# Altium PCB 1715A8131-600-R1.pcbdoc (part 2 of 2)
Units mm, origin at the board's own origin, x right, y up, seen from the top; angles counter-clockwise.
Board outline 48.5 x 30.7 mm, 6 copper layers (Top, Internal Layer 1, Internal Plane 1, Internal Plane 2, Internal Layer 2, Bottom), stack 0.72 mm thick; 98 components, 51 nets, 361 pads, 276 vias.
Unrouted connection lines stored in the file: 1.
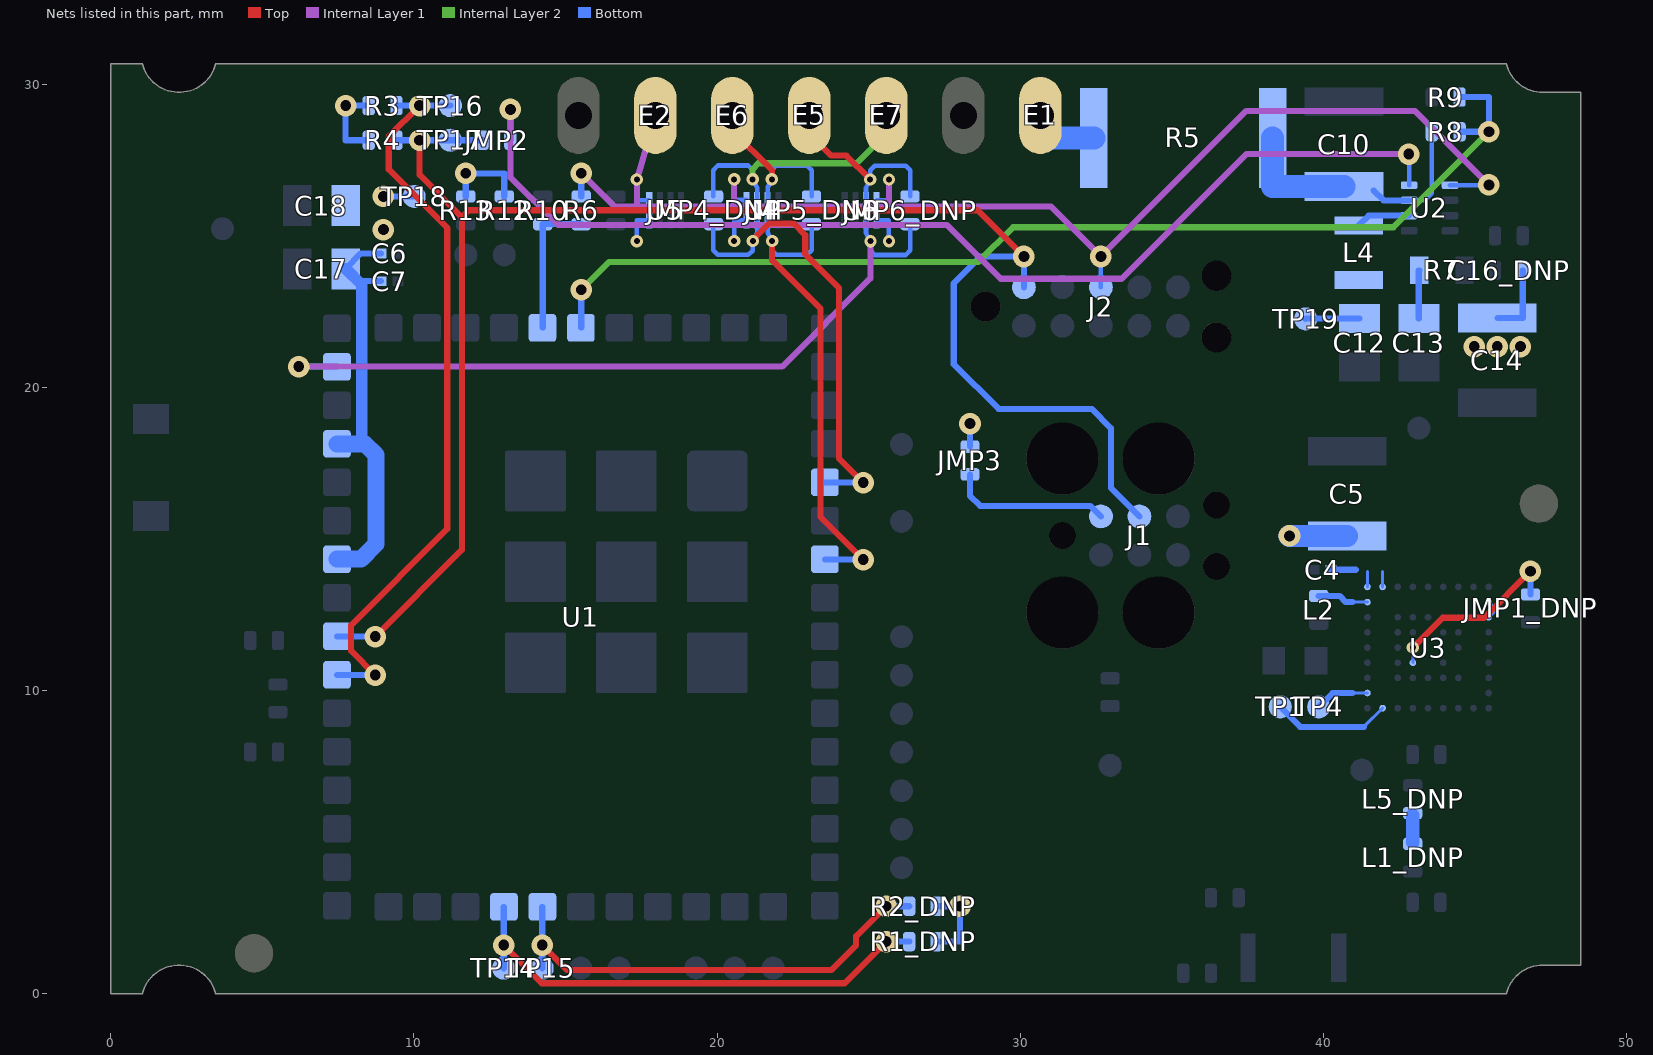
[diagram p6: the nets of this part, all layers, seen from the top]

## Via types
v1: diameter 0.711, hole 0.356, Top to Bottom, tented both sides, 187 vias
v2: diameter 0.406, hole 0.203, Top to Bottom, tented both sides, 53 vias
v3: diameter 0.5, hole 0.2, Top to Bottom, 36 vias

## Nets (pads, with @x,y where several pads share a name; then routed paths per layer and width w, separated by ;. In a path a pad name is that pad's centre, name@x,y a point inside that pad or via, vN(x,y) a via of type N, cw(c..) or ccw(c..) an arc to the next point about the centre after c; other vN are vias at no path point) (continued)
NetJ1_1: J1.1@32.666,15.758 JMP3.2 | length 5.3
  Bottom w0.203: JMP3.2@28.346,17.145 28.346,16.434 28.677,16.104 32.32,16.104 J1.1@32.666,15.758
NetJMP1_DNP_2: JMP1_DNP.2 U3.D4 | length 6.2
  Top w0.203: v2(42.959,11.43) 43.942,12.413 45.306,12.413 v1(46.838,13.945)
  Bottom w0.102: U3.D4@42.959,10.93 v2(42.959,11.43)
  Bottom w0.203: JMP1_DNP.2@46.838,13.182 v1(46.838,13.945)
NetL1_DNP_2: L1_DNP.2 L5_DNP.1 | length 0.9
  Bottom w0.445: L1_DNP.2@42.951,5.004 L5_DNP.1@42.951,5.893
NetL2_1: L2.1 U3.H1 | length 1.7
  Bottom w0.102: 40.959,12.93 U3.H1@41.459,12.93
  Bottom w0.203: L2.1@39.853,13.132 40.539,13.132 40.74,12.93 40.959,12.93
NetL4_1: L4.1 U2.6 | length 1.8
  Bottom w0.203: L4.1@41.173,25.36 41.497,25.683 U2.6@42.835,25.683
NetR1_DNP_2: R1_DNP.2 TP14.1 U1.24 | length 16.5
  Top w0.203: v1(12.961,1.613) 14.219,0.356 24.206,0.356 v1(25.578,1.727)
  Bottom w0.203: TP14.1@12.961,0.851 v1(12.961,1.613) U1.24@12.961,2.867 ; v1(25.578,1.727) R1_DNP.2@26.34,1.727
NetR2_DNP_2: R2_DNP.2 TP15.1 U1.23 | length 15.5
  Top w0.203: v1(14.231,1.613) 15.057,0.787 23.774,0.787 24.587,1.6 24.587,1.905 v1(25.578,2.896)
  Bottom w0.203: TP15.1@14.231,0.851 v1(14.231,1.613) U1.23@14.231,2.867 ; v1(25.578,2.896) R2_DNP.2@26.34,2.896
NetR3_1: R3.1 TP16.1 U1.34 | length 24.7
  Top w0.203: v1(8.723,10.523) 7.925,11.321 7.925,12.167 11.1,15.342 11.1,25.273 9.169,27.203 9.169,28.296 v1(10.185,29.312)
  Bottom w0.203: U1.34@7.469,10.523 v1(8.723,10.523) ; R3.1@9.423,29.312 v1(10.185,29.312) TP16.1@11.201,29.312
NetTP1_1: TP1.1 U3.A2 | length 3.9
  Bottom w0.102: 41.343,8.814 U3.A2@41.959,9.43
  Bottom w0.203: TP1.1@38.583,9.474 39.243,8.814 41.343,8.814
NetTP4_1: TP4.1 U3.B1 | length 1.8
  Bottom w0.102: 40.959,9.93 U3.B1@41.459,9.93
  Bottom w0.203: TP4.1@39.853,9.474 40.308,9.93 40.959,9.93
NetU3_G9: U3.G9 U3.H9 | length 0.7
  Bottom w0.102: U3.G9@45.459,12.43 45.709,12.68 U3.H9@45.459,12.93
"PACK +": E1.1 R5.2 | length 2.5
  Bottom w0.762: E1.1@30.667,28.986 30.667,28.245 R5.2@32.432,28.245
PG: JMP2.2 U2.8 | length 37
  Internal Layer 1 w0.203: v1(13.183,29.185) 13.183,26.949 14.757,25.375 27.584,25.375 29.362,23.597 33.35,23.597 37.465,27.711 v1(42.824,27.711)
  Bottom w0.152: v1(42.824,27.711) 42.835,27.711 U2.8@42.835,26.683
  Bottom w0.203: JMP2.2@13.182,28.169 v1(13.183,29.185)
RESET_N: J1.3 J2.1 JMP2.1 R4.2 TP17.1 U1.35 | length 57.2
  Top w0.203: v1(8.723,11.793) 11.582,14.652 11.582,25.629 ; v1(10.185,28.169) 10.185,27.026 11.582,25.629 ; v1(30.124,24.333) 28.6,25.857 11.811,25.857 11.582,25.629
  Bottom w0.203: U1.35@7.469,11.793 v1(8.723,11.793) ; R4.2@9.423,28.169 v1(10.185,28.169) TP17.1@11.201,28.169 JMP2.1@12.268,28.169 ; J2.1@30.124,23.317 v1(30.124,24.333) 28.702,24.333 27.813,23.444 27.813,20.777 29.289,19.301 32.362,19.301 32.995,18.669 32.995,16.699 J1.3@33.936,15.758
SPI_MISO: E5.1 JMP6_DNP.1 U6.7 | length 6.6
  Top w0.152: E5.1@23.047,28.388 E5.1@23.047,28.986
  Top w0.203: E5.1@23.047,28.388 23.774,27.661 24.267,27.661 v2(25.052,26.876)
  Bottom w0.152: U6.7@24.915,26.192 24.915,26.596 v2(25.052,26.876) 25.052,27.175 25.21,27.333 26.22,27.333 26.375,27.178 JMP6_DNP.1@26.375,26.314
SPI_MISO_VCC: JMP6_DNP.2 U1.42 U6.2 | length 25.9
  Internal Layer 1 w0.203: v1(6.198,20.701) 22.149,20.701 25.062,23.614 v2(25.062,24.839)
  Internal Layer 2 w0.203: v2(25.062,24.839) v2@25.062,24.886
  Bottom w0.152: U6.2@24.915,25.522 24.915,25.118 v2@25.052,24.839 ; v2@25.072,24.839 25.072,24.519 25.21,24.382 26.22,24.382 26.375,24.537 JMP6_DNP.2@26.375,25.4
  Bottom w0.203: v1(6.198,20.701) U1.42@7.451,20.701
SPI_MOSI: E6.1 JMP5_DNP.1 U4.3 | length 6
  Top w0.152: E6.1@20.507,28.489 E6.1@20.507,28.986
  Top w0.203: E6.1@20.507,28.489 21.808,27.188 v2(21.808,26.878)
  Bottom w0.152: U4.3@21.671,26.195 21.671,26.599 v2(21.808,26.878) ; v2@21.819,26.878 21.819,27.198 21.956,27.335 22.967,27.335 23.122,27.18 JMP5_DNP.1@23.122,26.317
SPI_MOSI_VCC: JMP5_DNP.2 U1.7 U4.6 | length 16.3
  Top w0.203: v2(21.819,24.841) 21.819,24.206 23.419,22.606 23.419,15.737 v1(24.823,14.333)
  Bottom w0.152: U4.6@21.671,25.525 21.671,25.121 v2@21.808,24.841 ; v2(21.819,24.841) 21.819,24.521 21.956,24.384 22.967,24.384 23.122,24.539 JMP5_DNP.2@23.122,25.403
  Bottom w0.203: U1.7@23.569,14.333 v1(24.823,14.333)
SPI_SCLK: E7.1 JMP4_DNP.1 U4.2 | length 9.2
  Internal Layer 2 w0.152: E7.1@25.587,28.381 E7.1@25.587,28.986
  Internal Layer 2 w0.203: v2(21.173,26.878) 21.173,27.219 21.361,27.407 24.613,27.407 E7.1@25.587,28.381
  Bottom w0.152: JMP4_DNP.1@19.87,26.317 19.87,27.18 20.025,27.335 21.036,27.335 21.173,27.198 v2(21.173,26.878) ; v2@21.184,26.878 21.321,26.599 U4.2@21.321,26.195
SPI_SCLK_VCC: JMP4_DNP.2 U1.5 U4.7 | length 15.7
  Top w0.203: v2(21.184,24.841) 21.184,24.889 21.72,25.425 22.527,25.425 22.911,25.041 22.911,24.409 24.028,23.292 24.028,17.667 v1(24.823,16.873)
  Bottom w0.152: JMP4_DNP.2@19.87,25.403 19.87,24.539 20.025,24.384 21.036,24.384 21.173,24.521 v2@21.173,24.841 ; v2(21.184,24.841) 21.321,25.121 U4.7@21.321,25.525
  Bottom w0.203: U1.5@23.569,16.873 v1(24.823,16.873)
V_BAT: C10.1 R5.1 R8.2 U2.7 | length 8.1
  Bottom w0.152: U2.7@42.835,26.183 43.354,26.183 43.587,26.416 R8.2@43.587,28.448
  Bottom w0.203: C10.1@41.667,26.507 41.99,26.183 U2.7@42.835,26.183
  Bottom w0.762: R5.1@38.332,28.245 38.332,26.642 C10.1@40.691,26.642
V_BAT_MON: R8.1 R9.1 U1.49 | length 36.4
  Internal Layer 2 w0.203: v1(15.519,23.239) 16.436,24.155 28.626,24.155 29.769,25.298 42.316,25.298 v1(45.466,28.448)
  Bottom w0.203: U1.49@15.519,21.985 v1(15.519,23.239) ; R8.1@44.501,28.448 v1(45.466,28.448) 45.466,29.591 R9.1@44.5,29.591
V_HOST: E2.1 J2.3 R6.2 U2.1 U4.1 U5.1 U6.8 | length 45.3
  Internal Layer 1 w0.203: v1(15.519,27.076) 16.612,25.984 17.356,25.984 ; E2.1@17.967,28.986 v2(17.356,26.876) 17.356,25.984 ; 20.564,25.987 v2(20.564,26.878) ; 25.672,25.984 v2(25.672,26.876) ; v1(45.466,26.695) 43.028,29.134 37.465,29.134 v1(32.664,24.333) 31.013,25.984 17.356,25.984
  Bottom w0.152: v2(17.356,26.876) 17.356,26.192 U5.1@17.763,26.192 ; v2(20.564,26.878) 20.564,26.195 U4.1@20.971,26.195 ; U6.8@25.265,26.192 25.672,26.192 v2(25.672,26.876) ; J2.3@32.664,23.317 v1(32.664,24.333) ; U2.1@44.185,26.683 45.466,26.683 v1(45.466,26.695)
  Bottom w0.203: R6.2@15.519,26.314 v1(15.519,27.076)
V_HOST_MON: R6.1 R10.1 U1.48 | length 4.7
  Bottom w0.203: U1.48@14.249,21.985 R10.1@14.249,25.4 R6.1@15.519,25.4
VCC: C4.1 C5.1 C6.1 C7.1 C12.1 C13.1 C14.1 C16_DNP.1 C17.1 C18.1 JMP3.1 L4.2 R1_DNP.1 R2_DNP.1 R3.2 R4.1 R7.1 R12.1 R13.1 TP18.1 TP19.1 U1.37 U1.40 U3.J1 U3.J2 U4.8 U5.8 U6.1 | length 37.4
  Bottom w0.102: U3.J1@41.459,13.43 41.459,13.93 ; U3.J2@41.959,13.43 41.959,13.93
  Bottom w0.152: v2(17.356,24.839) 17.356,25.522 U5.8@17.763,25.522 ; v2(20.564,24.841) 20.564,25.525 U4.8@20.971,25.525 ; U6.1@25.265,25.522 25.672,25.522 v2(25.672,24.839)
  Bottom w0.203: R4.1@8.509,28.169 7.747,28.169 v1(7.747,29.312) R3.2@8.509,29.312 ; C7.1@8.915,23.52 8.153,23.52 C17.1@7.747,23.927 8.252,24.432 C6.1@8.915,24.432 ; v1(8.992,26.314) TP18.1@10.008,26.314 ; R13.1@11.709,26.314 v1(11.709,27.076) 12.979,27.076 R12.1@12.979,26.314 ; R1_DNP.1@27.254,1.727 28.016,1.727 v1(28.016,2.896) R2_DNP.1@27.254,2.896 ; JMP3.1@28.346,18.059 v1(28.346,18.821) ; v1@38.887,15.11 v1(38.887,15.113) ; TP19.1@39.421,22.276 39.421,22.288 C12.1@41.199,22.288 ; C4.1@40.26,13.995 41.072,13.995 ; C13.1@43.155,22.288 43.155,23.876 R7.1@43.167,23.876 ; C14.1@45.745,22.304 46.583,22.304 C16_DNP.1@46.583,23.876
  Bottom w0.381: C17.1@7.747,23.927 8.284,23.39 8.284,18.259 8.391,18.152
  Bottom w0.559: U1.37@7.46,14.351 8.261,14.351 8.751,14.841 8.751,17.792 8.391,18.152 U1.40@7.46,18.152
  Bottom w0.711: v1@38.887,15.11 C5.1@40.792,15.11
  other v1: 44.983,21.361 45.745,21.361 46.507,21.361 8.992,25.222
pads on no net: FID1.1 FID2.1 FID3.1 FID4.1 J1.1@31.396,12.583 J1.1@31.396,15.123 J1.1@31.396,17.663 J1.1@34.571,12.583 J1.1@34.571,17.663 J1.1@36.476,14.107 J1.1@36.476,16.139 J2.4 J2.6 J2.ALIGN U1.0 U1.3 U1.20 U1.25 U1.26 U1.29 U1.33 U1.36 U1.39 U1.41 U1.44 U1.45 U1.50 U1.51 U1.52 U1.53 U1.54 U2.4 U3.A6 U3.C5 U3.C6 U3.D1 U3.E9 U3.F1 U3.F3 U3.F4 U3.F6 U3.F9 U3.G5 U3.J7 U3.J8 U4.0 U5.0 U5.6 U6.0 U6.6

## Polygon pours and split planes (outlines as drawn)
GND on Bottom "Bottom GND" (solid, remove dead copper, pour order 45): 0,0 0,30.7 1.037,30.7 ccw(c2.25,31) 3.463,30.7 46.037,30.7 ccw(c47.25,31) 47.25,29.75 48.5,29.75 48.5,0.95 47.25,0.95 ccw(c47.25,-0.3) 46.037,0 3.463,0 ccw(c2.25,-0.3) 1.037,0
no net on Drill Drawing "Drill Drawing-No Net" (solid, pour order 46): -95.468,-21.517 -95.468,-31.677 -81.498,-31.677 -81.498,-26.597 -88.483,-26.597 -88.483,-21.517
GND on Top "Top GND" (solid, remove dead copper, pour order 38): 0,0 0,30.7 1.037,30.7 ccw(c2.25,31) 3.463,30.7 46.037,30.7 ccw(c47.25,31) 47.25,29.75 48.5,29.75 48.5,0.95 47.25,0.95 ccw(c47.25,-0.3) 46.037,0 3.463,0 ccw(c2.25,-0.3) 1.037,0
GND on Internal Layer 1 "INT1 GND" (solid, remove dead copper, pour order 39): 0,0 0,30.7 1.037,30.7 ccw(c2.25,31) 3.463,30.7 46.037,30.7 ccw(c47.25,31) 47.25,29.75 48.5,29.75 48.5,0.95 47.25,0.95 ccw(c47.25,-0.3) 46.037,0 3.463,0 ccw(c2.25,-0.3) 1.037,0
GND on Internal Layer 2 "INT2 GND" (solid, remove dead copper, pour order 40): 0,0 0,30.7 1.037,30.7 ccw(c2.25,31) 3.463,30.7 46.037,30.7 ccw(c47.25,31) 47.25,29.75 48.5,29.75 48.5,0.95 47.25,0.95 ccw(c47.25,-0.3) 46.037,0 3.463,0 ccw(c2.25,-0.3) 1.037,0
GND on Internal Plane 1 (split plane): 45.698,30.17 45.787,30.022 45.889,29.883 46.005,29.755 46.133,29.639 46.272,29.537 46.42,29.448 46.576,29.374 46.739,29.316 46.907,29.274 47.077,29.248 47.243,29.24 47.25,29.24 47.99,29.24 47.99,1.46 47.25,1.46 47.243,1.46 47.077,1.452 46.907,1.426 46.739,1.384 46.576,1.326 46.42,1.252 46.272,1.163 46.133,1.061 46.005,0.945 45.889,0.817 45.787,0.678 45.698,0.53 45.689,0.51 41.205,0.51 41.205,5.364 35.705,5.364 35.705,0.51 3.811,0.51 3.802,0.53 3.713,0.678 3.611,0.817 3.495,0.945 3.367,1.061 3.228,1.163 3.08,1.252 2.924,1.326 2.761,1.384 2.593,1.426 2.423,1.452 2.25,1.46 2.077,1.452 1.907,1.426 1.739,1.384 1.576,1.326 1.42,1.252 1.272,1.163 1.133,1.061 1.005,0.945 0.889,0.817 0.787,0.678 0.698,0.53 0.689,0.51 0.51,0.51 0.51,12.89 5.535,12.89 5.535,20.009 0.51,20.015 0.51,30.19 0.689,30.19 0.698,30.17 0.787,30.022 0.889,29.883 1.005,29.755 1.133,29.639 1.272,29.537 1.42,29.448 1.576,29.374 1.739,29.316 1.907,29.274 2.077,29.248 2.25,29.24 2.423,29.248 2.593,29.274 2.761,29.316 2.924,29.374 3.08,29.448 3.228,29.537 3.367,29.639 3.495,29.755 3.611,29.883 3.713,30.022 3.802,30.17 3.811,30.19 45.689,30.19
VCC on Internal Plane 2 (split plane): 45.698,30.17 45.787,30.022 45.889,29.883 46.005,29.755 46.133,29.639 46.272,29.537 46.42,29.448 46.576,29.374 46.739,29.316 46.907,29.274 47.077,29.248 47.243,29.24 47.25,29.24 47.99,29.24 47.99,1.46 47.25,1.46 47.243,1.46 47.077,1.452 46.907,1.426 46.739,1.384 46.576,1.326 46.42,1.252 46.272,1.163 46.177,1.093 46.177,14.051 40.684,14.051 40.684,5.364 35.705,5.364 35.712,0.51 25.4,0.51 25.4,23.8 0.51,23.8 0.51,30.19 0.689,30.19 0.698,30.17 0.787,30.022 0.889,29.883 1.005,29.755 1.133,29.639 1.272,29.537 1.42,29.448 1.576,29.374 1.739,29.316 1.907,29.274 2.077,29.248 2.25,29.24 2.423,29.248 2.593,29.274 2.761,29.316 2.924,29.374 3.08,29.448 3.228,29.537 3.367,29.639 3.495,29.755 3.611,29.883 3.713,30.022 3.802,30.17 3.811,30.19 45.689,30.19

## Keep-outs
Board:
  the board outline again, w0.127

## Other copper
Top:
  pour cut-out: 35.705,5.364 41.205,5.364 41.205,0 35.712,0
  pour cut-out: 1.944,12.89 0.229,12.89 0.229,20.009 2.486,20.009 5.535,20.009 5.535,12.89
  text "TOP LAYER" at 99.147,107.794 h2.03
  text "1715-8131" at 31.852,28.804 h1.78
  text "1L1" at 4.394,26.518 h2.03 r90
  text "2" at 114.097,-58.293 h1.27
Internal Layer 1:
  pour cut-out: 35.705,5.364 41.205,5.364 41.205,0 35.712,0
  pour cut-out: 1.944,12.89 0.229,12.89 0.229,20.009 2.486,20.009 5.535,20.009 5.535,12.89
  text "INTERNAL LAYER 1" at 94.245,107.718 h2.03
  text "1L2" at 4.394,26.518 h2.03 r90
  text "3" at 114.097,-58.293 h1.27
Internal Layer 2:
  pour cut-out: 25.4,0 25.4,23.8 0,23.8 0,0
  pour cut-out: 35.705,5.364 41.205,5.364 41.205,0 35.712,0
  pour cut-out: 40.684,14.051 46.184,14.051 46.184,0 40.702,0
  text "INTERNAL LAYER 2" at 94.245,107.718 h2.03
  text "1L5" at 4.394,29.058 h2.03 r90
  text "6" at 114.097,-58.293 h1.27
Bottom:
  rectangle net GND: 11.481,7.188 22.555,19.228
  rectangle net GND: 4.722,8.563 5.105,8.992
  rectangle net GND: 4.722,10.668 5.105,11.097
  rectangle net GND: 4.722,12.243 5.105,12.89
  region net GND: 35.708,3.398 35.708,0.246 34.188,0.246 34.188,3.404
  region net GND: 39.395,29.921 39.395,28.042 41.986,28.042 41.986,29.921
  region net VCC: 47.041,22.784 41.986,22.784 41.986,23.876 40.361,23.876 40.361,21.793 44.45,21.793 44.45,20.98 47.041,20.98
  region net VCC: 7.264,23.241 7.264,26.695 9.373,26.695 9.373,24.841 8.484,24.841 8.484,23.241
  pour cut-out: 4.135,11.089 4.135,12.241 5.073,12.241 5.073,11.089
  pour cut-out: 4.135,7.411 4.135,8.563 5.073,8.563 5.073,7.411
  pour cut-out: 9.107,7.53 6.763,7.53 6.763,5.956 9.105,5.956
  pour cut-out: 0.392,16.299 1.944,16.299 1.944,12.89 5.534,12.89 5.534,18.986 1.944,18.986 1.944,18.458 0.392,18.458
  region net VCC: 42.062,15.57 42.062,13.843 40.691,13.843 40.691,14.427 39.497,14.427 39.497,15.57
  pour cut-out: 17.563,25.332 17.563,26.382 19.013,26.382 19.013,25.332
  pour cut-out: 20.771,25.335 20.771,26.385 22.221,26.385 22.221,25.335
  pour cut-out: 24.015,25.332 24.015,26.382 25.465,26.382 25.465,25.332
  pour cut-out: 31.804,26.417 39.395,26.417 39.395,30.073 31.804,30.073
  pour cut-out: 41.209,13.68 41.209,9.18 45.722,9.18 45.722,13.692
  region net GND: 44.094,18.669 44.094,20.799 47.396,20.799 47.396,18.669
  region net GND: 42.443,18.745 42.443,16.615 39.141,16.615 39.141,18.745
  pour cut-out: 40.196,25.56 40.196,23.36 42.073,23.36 42.073,25.56
  region net GND: 44.145,21.155 44.145,19.025 40.157,19.025 40.157,21.155
  pour cut-out: 35.705,5.364 41.205,5.364 41.205,0 35.712,0
  region net GND: 2.178,18.466 0.246,18.466 0.246,20.01 2.178,20.01
  region net GND: 2.178,12.89 2.178,16.281 0.246,16.281 0.246,12.89
  region net GND: 41.21,1.343 40.264,1.343 40.264,0.246 41.21,0.246
  text "BOTTOM LAYER" at 96.607,107.794 h2.03
  text "1L6" at 4.394,29.058 h2.03 r90
  text "7" at 114.097,-58.293 h1.27
Internal Plane 1 (plane layer: these items are gaps in the copper):
  region: 41.205,5.364 35.705,5.364 35.705,0 41.205,0
  region: 5.535,20.009 5.535,12.89 0,12.89 0,20.015
  text "INTERNAL PLANE LAYER 1" at 90.029,107.744 h2.03
  text "1L3" at 4.394,26.518 h2.03 r90
  text "4" at 114.097,-58.293 h1.27
Internal Plane 2 (plane layer: these items are gaps in the copper):
  region: 25.4,23.8 0,23.8 0,0 25.4,0
  region: 35.705,5.364 41.205,5.364 41.205,0 35.712,0
  region: 40.684,14.051 46.177,14.051 46.177,-0.007 40.684,-0.007
  text "INTERNAL PLANE LAYER 2" at 90.029,107.744 h2.03
  text "1L4" at 4.394,29.058 h2.03 r90
  text "5" at 114.097,-58.293 h1.27

## Silkscreen, mask and mechanical layers (free items; w line width, h text height)
Top Paste:
  circle w0.254: c-0.764,-16.399 r1.347
  region: -0.751,-16.412 -2.072,-16.412 -2.072,-16.437 ccw(c-0.751,-16.437) -0.751,-17.758
  region: -0.751,-16.412 0.57,-16.412 0.57,-16.386 ccw(c-0.751,-16.386) -0.751,-15.065
  text "TOP PASTE LAYER" at 95.337,107.794 h2.03
  text "SQUEEGEE SIDE" at 9.771,-12.819 h2.54
  text "INDICATES A FIDUCIAL, MARK STENCIL ACCORDINGLY" at 1.56,-16.996 h1.52
Bot Paste:
  circle w0.254: c49.96,-16.399 r1.347
  region: 49.973,-16.412 51.294,-16.412 51.294,-16.386 ccw(c49.973,-16.386) 49.973,-15.065
  region: 49.973,-16.412 48.652,-16.412 48.652,-16.437 ccw(c49.973,-16.437) 49.973,-17.758
  text "BOTTOM PASTE LAYER" at 92.797,107.794 h2.03
  text "SQUEEGEE SIDE" at 36.104,-12.856 h2.54
  text "INDICATES A FIDUCIAL, MARK STENCIL ACCORDINGLY" at 47.458,-17.123 h1.52
  text "1" at 114.097,-58.293 h1.27
Top Mask:
  text "TOP MASK LAYER" at 95.337,107.794 h2.03
  text "8" at 114.097,-58.293 h1.27
Bot Mask:
  text "BOTTOM MASK LAYER" at 92.797,107.794 h2.03
  text "9" at 114.097,-58.293 h1.27
Board1:
  the board outline again, w0.127
Top Silkscreen:
  text "TOP SILKSCREEN LAYER" at 91.527,107.794 h2.03
  text "1S1" at 6.147,26.391 h2.03 r90
  text "E4" at 16.038,25.168 h2.03 r90
  text "E2" at 18.578,25.168 h2.03 r90
  text "E6" at 21.118,25.168 h2.03 r90
  text "E5" at 23.658,25.168 h2.03 r90
  text "E7" at 26.198,25.168 h2.03 r90
  text "E8" at 28.738,25.168 h2.03 r90
  text "E1" at 31.278,25.168 h2.03 r90
  text "10" at 114.097,-58.293 h1.27
Bot Silkscreen:
  circle w0.254: c41.631,0.686 r0.127
  circle w0.254: c1.295,14.707 r0.127
  text "BOTTOM SILKSCREEN LAYER" at 88.824,107.848 h2.03
  text "1S6" at 2.591,29.134 h2.03 r90
  text "U3" at 46.355,8.331 h1.52
  text "11" at 114.097,-58.293 h1.27
Bottom Layout:
  lines w0.013: 34.261,0.364 42.503,0.364 ; 35.705,0.364 35.705,5.364 41.205,5.364 41.205,0.364 ; 36.105,0.364 36.105,3.364 36.505,3.364 36.505,0.764 37.305,0.764 37.305,1.964 37.705,1.964 37.705,0.364 ; 40.105,0.364 40.105,2.564 ccw(c39.705,2.564) 39.705,2.964 36.905,2.964 36.905,3.364 39.705,3.364 cw(c39.705,2.564) 40.505,2.564 40.505,1.964 41.942,1.964
  lines w0.254: -4.383,15.351 0,15.351
Top Layout:
  text "charge contacts" at -3.367,20.749 h2.5 r270
Part#:
  text "0" at 16.673,-45.647 h1.27
  text "06/06/2017" at 32.218,-45.647 h1.27
  text "SL" at 46.417,-45.647 h1.27
  text "03/26/2018" at 32.117,-48.136 h1.27
  text "SL" at 46.315,-48.136 h1.27
  text "1" at 16.673,-48.26 h1.27
  text "DTL: PCB,WIFI,BATTERY,VENTIS" at 58.837,-49.457 h2.29
  text "1715A8131-600" at 104.43,-55.68 h2.03
  text "11" at 121.209,-58.293 h1.27
Paste#:
  text "0" at 16.673,-45.647 h1.27
  text "06/06/2017" at 32.218,-45.647 h1.27
  text "SL" at 46.417,-45.647 h1.27
  text "03/26/2018" at 32.117,-48.136 h1.27
  text "SL" at 46.315,-48.136 h1.27
  text "1" at 16.673,-48.26 h1.27
  text "DTL: FXT,PCB,WIFI,BATTERY,VENTIS" at 58.837,-49.457 h2.29
  text "1715A8131-870" at 104.43,-55.655 h2.03
  text "1" at 121.209,-58.293 h1.27
Title:
  lines w0.127: 15.607,-56.442 51.167,-56.442 ; 15.607,-53.902 51.167,-53.902 ; 15.607,-51.362 51.167,-51.362 ; 15.607,-48.822 51.167,-48.822 ; 15.607,-46.282 51.167,-46.282
  lines w0.254: -74.513,-39.932 -74.513,111.198 ; 18.528,-58.855 18.528,-43.742 ; 30.847,-58.982 30.847,-39.932 ; 43.547,-58.982 43.547,-39.932 ; 51.217,-56.442 99.477,-56.442 129.957,-56.442 ; 51.217,-53.902 99.477,-53.902 ; 51.217,-51.362 129.957,-51.362 ; 98.207,-58.982 99.477,-58.982 99.477,-51.362
  lines w0.381: -113.883,-42.472 -113.883,-58.982 ; -113.883,-39.932 129.957,-39.932 ; -46.573,-58.982 -46.573,-39.932 ; -13.4,-58.982 -13.4,-39.932 ; -5.933,-58.982 -54.828,-58.982 -110.708,-58.982 -113.883,-58.982 ; 15.607,-58.982 15.607,-39.932 ; 15.607,-43.742 51.167,-43.742 ; 51.217,-58.982 51.217,-39.932 ; 51.217,-45.012 129.957,-45.012 ; 86.777,111.198 86.777,103.578 129.957,103.578 ; -113.883,-58.982 -113.883,111.198 129.957,111.198 129.957,-58.982 -113.883,-58.982
  text "ALL LAYERS ARE VIEWED FROM THE TOP LAYER SIDE" at 89.14,104.696 h1.02
  text "DO NOT CHANGE THIS DRAWING" at -12.537,-41.879 h1.14
  text "FOR PANEL DRAWING REQUEST:" at -44.668,-42.472 h1.4
  text "DATE" at 34.707,-42.472 h1.27
  text "BY" at 46.137,-42.472 h1.27
  text "REVISIONS" at 18.07,-42.621 h1.27
  text "THIS PRINTED CIRCUIT BOARD IS CLASSIFIED AS" at -107.025,-43.261 h1.65
  text "WITHOUT THE FOLLOWING AGENCY" at -12.41,-43.64 h1.14
  text "INDUSTRIAL SCIENTIFIC CORPORATION" at 58.964,-43.767 h2.54
  text "APPROVAL(S):" at -12.41,-45.545 h1.14
  text "IPC CLASS 3 HIGH RELIABILITY. FOR BASE MATERIALS," at -110.708,-45.647 h1.65
  text "TITLE" at 51.852,-46.917 h1.27
  text "CONSTRUCTION, QUALITY  ASSURANCE, WORKMANSHIP" at -111.978,-48.187 h1.65
  text "AND PREPARATION FOR DELIVERY, REQUEST:" at -105.628,-50.727 h1.65
  text "1715C8131-625" at -44.16,-51.159 h2.41
  text "Dwg. No." at 100.112,-52.962 h1.02
  text "DRWN BY:" at 51.852,-53.267 h1.27
  text "SCOTT LOFSTEAD" at 61.377,-53.267 h1.27
  text "DATE:" at 80.427,-53.267 h1.27
  text "06/06/2017" at 86.777,-53.267 h1.27
  text "PRINTED CIRCUIT BOARD PROCUREMENT SPECIFICATION IPC B/M" at -112.79,-54.664 h1.47
  text "CHKD BY:" at 51.852,-55.807 h1.27
  text "DATE:" at 80.427,-55.807 h1.27
  text "DOCUMENT NUMBER 0000027479" at -99.201,-57.56 h1.47
  text "APPD BY:" at 51.852,-58.347 h1.27
  text "DATE:" at 80.427,-58.347 h1.27
  text "SHEET         OF" at 103.287,-58.347 h1.27
Drill Drawing:
  drawing of 372 lines, arcs and shapes, not listed
  text "Symbol" at -70.475,108.7 h1.83
  text "Count" at -63.693,108.7 h1.83
  text "Hole Size" at -56.627,108.7 h1.83
  text "Plated" at -48.31,108.7 h1.83
  text "Hole Type" at -42.402,108.7 h1.83
  text "Hole Tolerance (+)" at -33.63,108.7 h1.83
  text "Hole Tolerance (-)" at -18.709,108.7 h1.83
  text "NOTES" at -113.248,108.658 h1.91
  text "FAB LAYER" at 99.147,107.794 h2.03
  text "36" at -63.693,106.177 h1.52
  text "0.200mm" at -56.627,106.177 h1.52
  text "PTH" at -48.31,106.177 h1.52
  text "Round" at -42.402,106.177 h1.52
  text "A" at -71.023,105.923 h1.12
  text "PHOTOPLOTS OR COPIES OF PHOTOPLOTS" at -113.248,105.483 h1.27
  text "CONTROLLED IMPEDANCE USING CPW WITH GND" at 24.79,104.673 h1.78
  text "53" at -63.693,103.653 h1.52
  text "0.203mm" at -56.627,103.653 h1.52
  text "PTH" at -48.31,103.653 h1.52
  text "Round" at -42.402,103.653 h1.52
  text "TO BE SUBMITTED TO INDUSTRIAL" at -113.248,103.578 h1.27
  text "B" at -71.023,103.4 h1.12
  text "SCIENTIFIC'S ENGINEERING DEPT FOR" at -113.248,101.673 h1.27
  text "187" at -63.693,101.13 h1.52
  text "0.356mm" at -56.627,101.13 h1.52
  text "PTH" at -48.31,101.13 h1.52
  text "Round" at -42.402,101.13 h1.52
  text "C" at -71.023,100.876 h1.12
  text "APPROVAL BEFORE PRODUCTION BEGINS." at -113.248,99.768 h1.27
  text "3" at -63.693,98.607 h1.52
  text "0.889mm" at -56.627,98.607 h1.52
  text "NPTH" at -48.31,98.607 h1.52
  text "Round" at -42.402,98.607 h1.52
  text "D" at -71.023,98.353 h1.12
  text "ALL VIAS TO BE TENTED AND OR PLUGGED" at -113.248,96.593 h1.27
  text "7" at -63.693,96.083 h1.52
  text "0.889mm" at -56.627,96.083 h1.52
  text "PTH" at -48.31,96.083 h1.52
  text "Round" at -42.402,96.083 h1.52
  text "E" at -71.023,95.83 h1.12
  text "UNLESS OTHERWISE SPECIFIED." at -113.248,94.688 h1.27
  text "3" at -63.693,93.56 h1.52
  text "0.991mm" at -56.627,93.56 h1.52
  text "NPTH" at -48.31,93.56 h1.52
  text "Round" at -42.402,93.56 h1.52
  text "0.076mm" at -33.63,93.56 h1.52
  text "0.076mm" at -18.709,93.56 h1.52
  text "F" at -71.023,93.306 h1.12
  text "4" at -63.693,91.037 h1.52
  text "2.375mm" at -56.627,91.037 h1.52
  text "NPTH" at -48.31,91.037 h1.52
  text "Round" at -42.402,91.037 h1.52
  text "G" at -71.023,90.783 h1.12
  text "DIMENSIONS: MILLIMETERS" at -113.248,90.243 h1.65
  text "293 Total" at -63.693,88.513 h1.52
  text "TOLERANCE UNLESS OTHERWISE" at -113.248,86.433 h1.65
  text "SPECIFIED:" at -113.248,83.893 h1.65
  text "Layer" at -70.482,82.831 h1.52
  text "Name" at -64.105,82.831 h1.52
  text "Material" at -51.702,82.831 h1.52
  text "Thickness" at -35.349,82.831 h1.52
  text "Constant" at -26.245,82.831 h1.52
  text "Board Layer Stack" at -17.819,82.831 h1.52
  text ".X = +/- .3" at -98.338,80.769 h1.4
  text "1" at -70.482,79.783 h1.52
  text "Top Silk" at -64.105,79.783 h1.52
  text ".XX = +/- .13" at -99.608,78.229 h1.4
  text "2" at -70.482,76.735 h1.52
  text "Top Mask" at -64.105,76.735 h1.52
  text "Solder Resist" at -51.702,76.735 h1.52
  text "0.025mm" at -35.349,76.735 h1.52
  text "3.5" at -26.245,76.735 h1.52
  text "ANGULAR = +/- 1/2 DEG." at -105.628,75.638 h1.4
  text "3" at -70.482,73.687 h1.52
  text "Top" at -64.105,73.687 h1.52
  text "Copper" at -51.702,73.687 h1.52
  text "0.038mm" at -35.349,73.687 h1.52
  text "4" at -70.482,70.639 h1.52
  text "Dielectric 1" at -64.105,70.639 h1.52
  text "IT180ABS/1080 RC66" at -51.702,70.639 h1.52
  text "0.070mm" at -35.349,70.639 h1.52
  text "3.79" at -26.245,70.639 h1.52
  text "SPECIFICATIONS:" at -112.613,70.558 h1.78
  text "UNLESS OTHERWISE SPECIFIED" at -112.613,68.018 h1.78
  text "5" at -70.482,67.591 h1.52
  text "Internal Layer 1" at -64.105,67.591 h1.52
  text "Copper" at -51.702,67.591 h1.52
  text "0.011mm" at -35.349,67.591 h1.52
  text "6" at -70.482,64.543 h1.52
  text "Dielectric 2" at -64.105,64.543 h1.52
  text "IT180A" at -51.702,64.543 h1.52
  text "0.180mm" at -35.349,64.543 h1.52
  text "4.35" at -26.245,64.543 h1.52
  text "MATERIAL: COPPER CLAD, GLASS BASE," at -112.613,64.208 h1.27
  text "EPOXY RESIN, FLAME RETARDANT (FR4)" at -112.613,62.303 h1.27
  text "7" at -70.482,61.495 h1.52
  text "Internal Plane 1" at -64.105,61.495 h1.52
  text "Copper" at -51.702,61.495 h1.52
  text "0.011mm" at -35.349,61.495 h1.52
  text "MATERIAL THICKNESS: Millimeters" at -112.613,59.128 h1.27
  text "8" at -70.482,58.447 h1.52
  text "Dielectric 5" at -64.105,58.447 h1.52
  text "IT180ABS/2113 RC58" at -51.702,58.447 h1.52
  text "0.100mm" at -35.349,58.447 h1.52
  text "4" at -26.245,58.447 h1.52
  text "W = 0.445MM / H = ? mils / G = 0.180MM /  / IMPEDANCE = 50 OHM +/-10% / REFERENCE GND = L3 /  / 1) Regarding the Er value, it is affected by the actual dielectric thickness, prepreg type (like 1080, 2116, etc.), copper coverage, compensation value, etc.,   / 2) The impedance of Layer 6 ref Layer 3, so H =?. / 3) Need to consider the solder mask thickness when we calculated the impedance with the Polar software,  / 4) External layer is base foil weight of 1/2oz,in order to meet min 38.4um surface conductor thickness per ISC’s Spec and fab drawing," at 4.089,58.039 h1.78
  text "UL RATING UL 94V-O." at -112.613,57.223 h1.27
  text "9" at -70.482,55.399 h1.52
  text "Internal Plane 2" at -64.105,55.399 h1.52
  text "Copper" at -51.702,55.399 h1.52
  text "0.011mm" at -35.349,55.399 h1.52
  text ".77 +/- .08" at -104.358,53.413 h1.27
  text "10" at -70.482,52.351 h1.52
  text "Dielectric 4" at -64.105,52.351 h1.52
  text "IT180A" at -51.702,52.351 h1.52
  text "0.180mm" at -35.349,52.351 h1.52
  text "4.35" at -26.245,52.351 h1.52
  text "L3" at 15.24,51.587 h1.78
  text "H" at 39.71,49.355 h1.78 r180
  text "11" at -70.482,49.303 h1.52
  text "Internal Layer 2" at -64.105,49.303 h1.52
  text "Copper" at -51.702,49.303 h1.52
  text "0.011mm" at -35.349,49.303 h1.52
  text "G" at 31.369,47.142 h1.78
  text "G" at 45.593,47.142 h1.78
  text "12" at -70.482,46.255 h1.52
  text "Dielectric 3" at -64.105,46.255 h1.52
  text "IT180ABS/1080 RC66" at -51.702,46.255 h1.52
  text "0.070mm" at -35.349,46.255 h1.52
  text "3.79" at -26.245,46.255 h1.52
  text "L6" at 15.24,43.739 h1.78
  text "13" at -70.482,43.207 h1.52
  text "Bottom" at -64.105,43.207 h1.52
  text "Copper" at -51.702,43.207 h1.52
  text "0.038mm" at -35.349,43.207 h1.52
  text "TOP AND BOTTOM SOLDER MASK TO BE" at -112.613,41.983 h1.27
  text "W" at 38.303,40.843 h1.78
  text "14" at -70.482,40.159 h1.52
  text "Bot Mask" at -64.105,40.159 h1.52
  text "Solder Resist" at -51.702,40.159 h1.52
  text "0.025mm" at -35.349,40.159 h1.52
  text "3.5" at -26.245,40.159 h1.52
  text "MATTE FINISH" at -112.613,40.078 h1.27
  text "15" at -70.482,37.111 h1.52
  text "Bot Silk" at -64.105,37.111 h1.52
  text "SILKSCREEN (IF REQUIRED):" at -112.613,36.903 h1.27
  text "WHITE EPOXY INK OR EQUIVALENT." at -112.613,34.998 h1.27
  text "MIN. COMPARATIVE TRACKING INDEX" at -112.613,31.823 h1.27
  text "(CTI) = 100" at -112.613,29.918 h1.27
  text "CLEANLINESS: THIS BOARD SHALL MEET" at -112.613,26.108 h1.27
  text "THE REQUIREMENTS OF IPC6012B-1.5" at -112.613,24.203 h1.27
  text "MICROGRAMS/SQ CM NaCL" at -112.613,22.298 h1.27
  text "OR EQUILIVENT" at -112.613,20.393 h1.27
  text "PC BOARD TO BE IMMERSION GOLD" at -112.613,17.218 h1.27
  text "PLATED WITH 3-5 MICRO INCHES OF" at -112.613,15.313 h1.27
  text "GOLD APPLIED OVER 120-240 MICRO" at -112.613,13.408 h1.27
  text "INCHES OF LOW STRESS NICKEL." at -112.613,11.503 h1.27
  text "REF  IPC-4552" at -112.613,9.598 h1.27
  text "LAYER FORMATION LEGEND" at -107.533,5.153 h1.52
  text "0" at -112.994,1.343 h1.4
  text "L" at -110.708,1.343 h1.4
  text "X" at -108.803,1.343 h1.4
  text "EXAMPLE:" at -101.183,1.343 h1.4
  text "LAYER NO. (SEE CHART)" at -106.898,-1.832 h1.14
  text "L = LAYER" at -84.038,-1.832 h1.14
  text "DESCRIPTION" at -106.898,-3.737 h1.14
  text "M = MASK" at -84.038,-3.737 h1.14
  text "REV LEVEL" at -106.898,-5.642 h1.14
  text "P = PASTE" at -84.038,-5.642 h1.14
  text "S = SILK" at -84.038,-7.166 h1.14
  text "LAYERS" at -88.452,-10.214 h1.4
  text "DESCRIPTION" at -109.641,-11.713 h1.27
  text "2" at -92.293,-12.627 h1.4
  text "4" at -85.308,-12.627 h1.4
  text "6" at -78.958,-12.627 h1.4
  text "COMP LAYER" at -108.168,-15.167 h1.27
  text "MASK" at -101.691,-16.996 h1.27
  text "X=1" at -86.578,-17.707 h1.4
  text "PASTE" at -102.427,-18.901 h1.27
  text "SILK" at -100.268,-20.831 h1.27
  text "X=2" at -83.403,-23.422 h1.4
  text "INTERNAL 1" at -106.415,-23.447 h1.27
  text "INTERNAL 2" at -106.72,-25.886 h1.27
  text "X=3" at -83.403,-25.962 h1.4
  text "INTERNAL 3" at -106.72,-28.477 h1.27
  text "X=4" at -79.593,-28.502 h1.4
  text "X=5" at -79.593,-31.042 h1.4
  text "INTERNAL 4" at -106.72,-31.144 h1.27
  text "SOLDER LAYER" at -109.514,-33.709 h1.27
  text "MASK" at -101.411,-35.665 h1.27
  text "X=2" at -94.096,-36.249 h1.4
  text "X=4" at -87.14,-36.249 h1.4
  text "X=6" at -80.097,-36.249 h1.4
  text "PASTE" at -102.148,-37.646 h1.27
  text "SILK" at -99.989,-39.399 h1.27
  text "1" at 114.097,-58.293 h1.27

## Dimensions
0,0 to 2.265,29.433 on Drill Drawing
0,0 to 45.698,-0.3 on Drill Drawing
47.25,31 to 44.145,27.737 on Drill Drawing
4.978,13.792 to -4.928,9.195 on Drill Drawing
5.305,7.762 to -4.928,6.096 on Drill Drawing
43.053,7.584 to 50.394,10.836 on Drill Drawing
43.053,5.4 to 50.394,8.651 on Drill Drawing
43.053,3.165 to 50.394,6.416 on Drill Drawing